# Altium PCB lite.PcbDoc
Units mil, origin at the board's own origin, x right, y up, seen from the top; angles counter-clockwise.
Board outline 6000 x 4000 mil, 2 copper layers (Top Layer, Bottom Layer); 45 components, 53 nets, 214 pads, 26 vias.
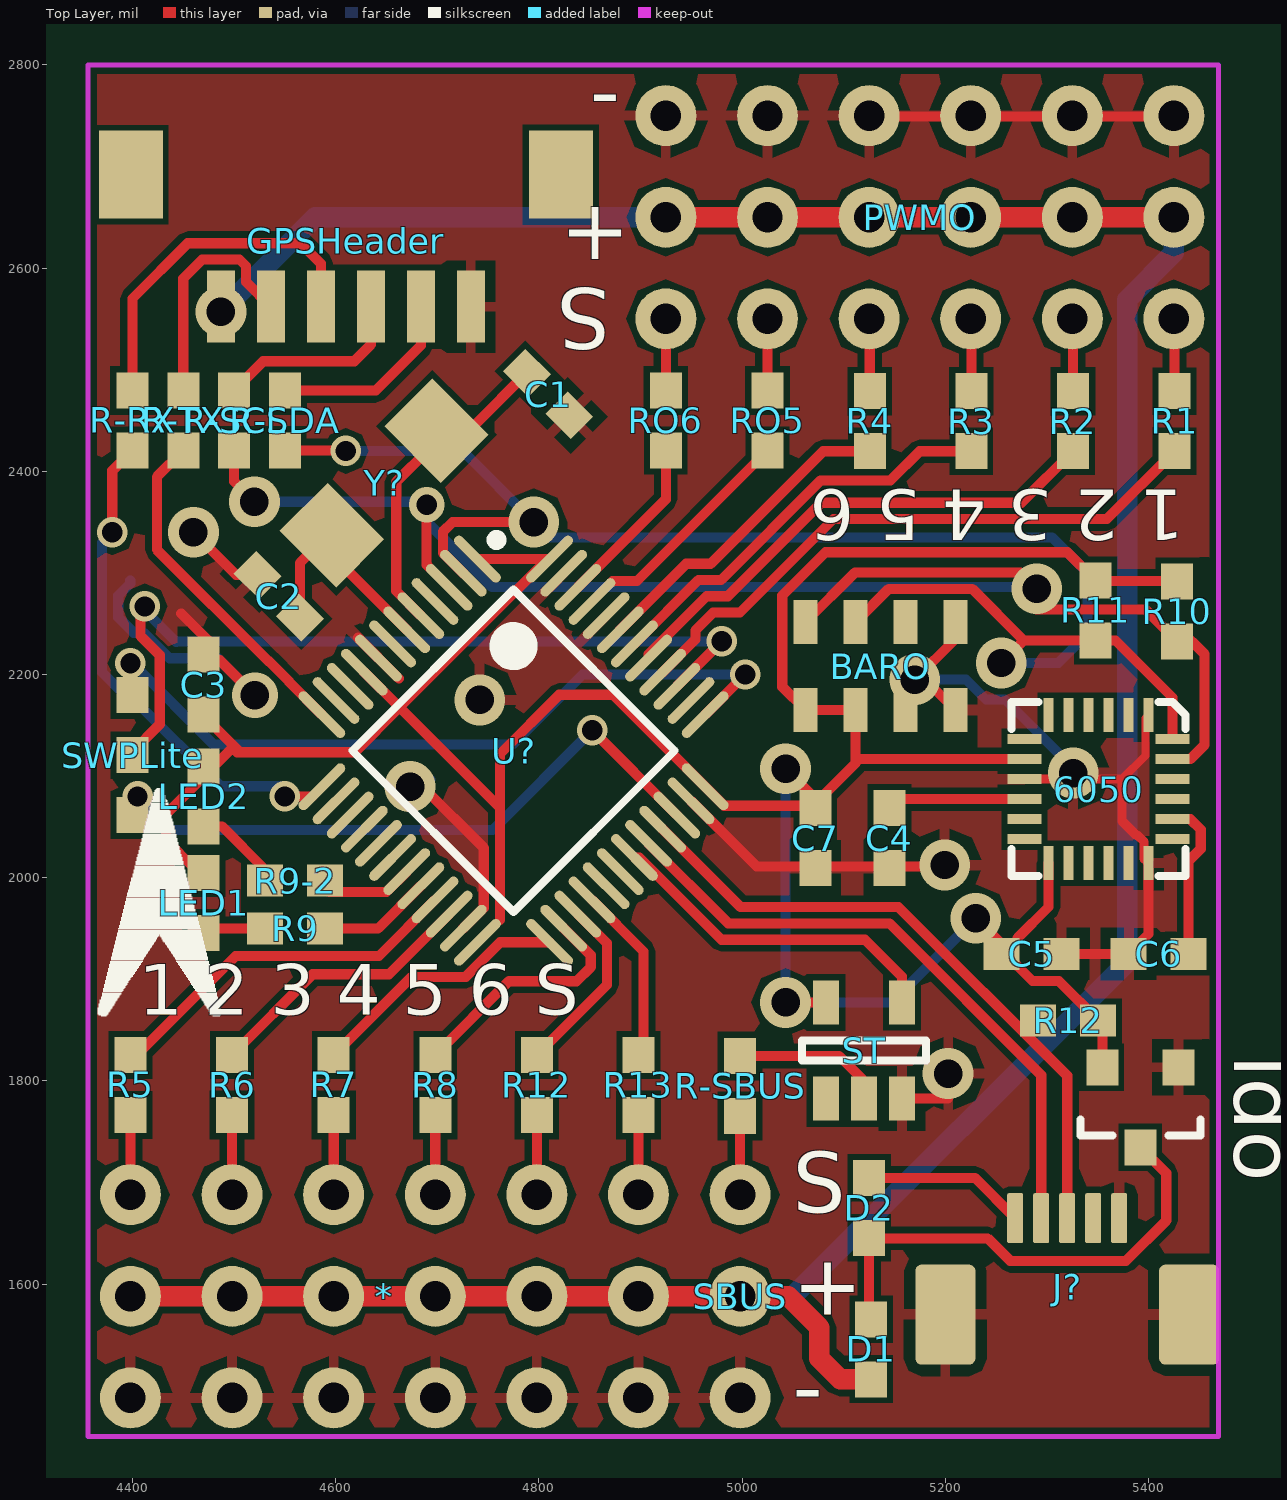
[diagram p0: Top Layer view]
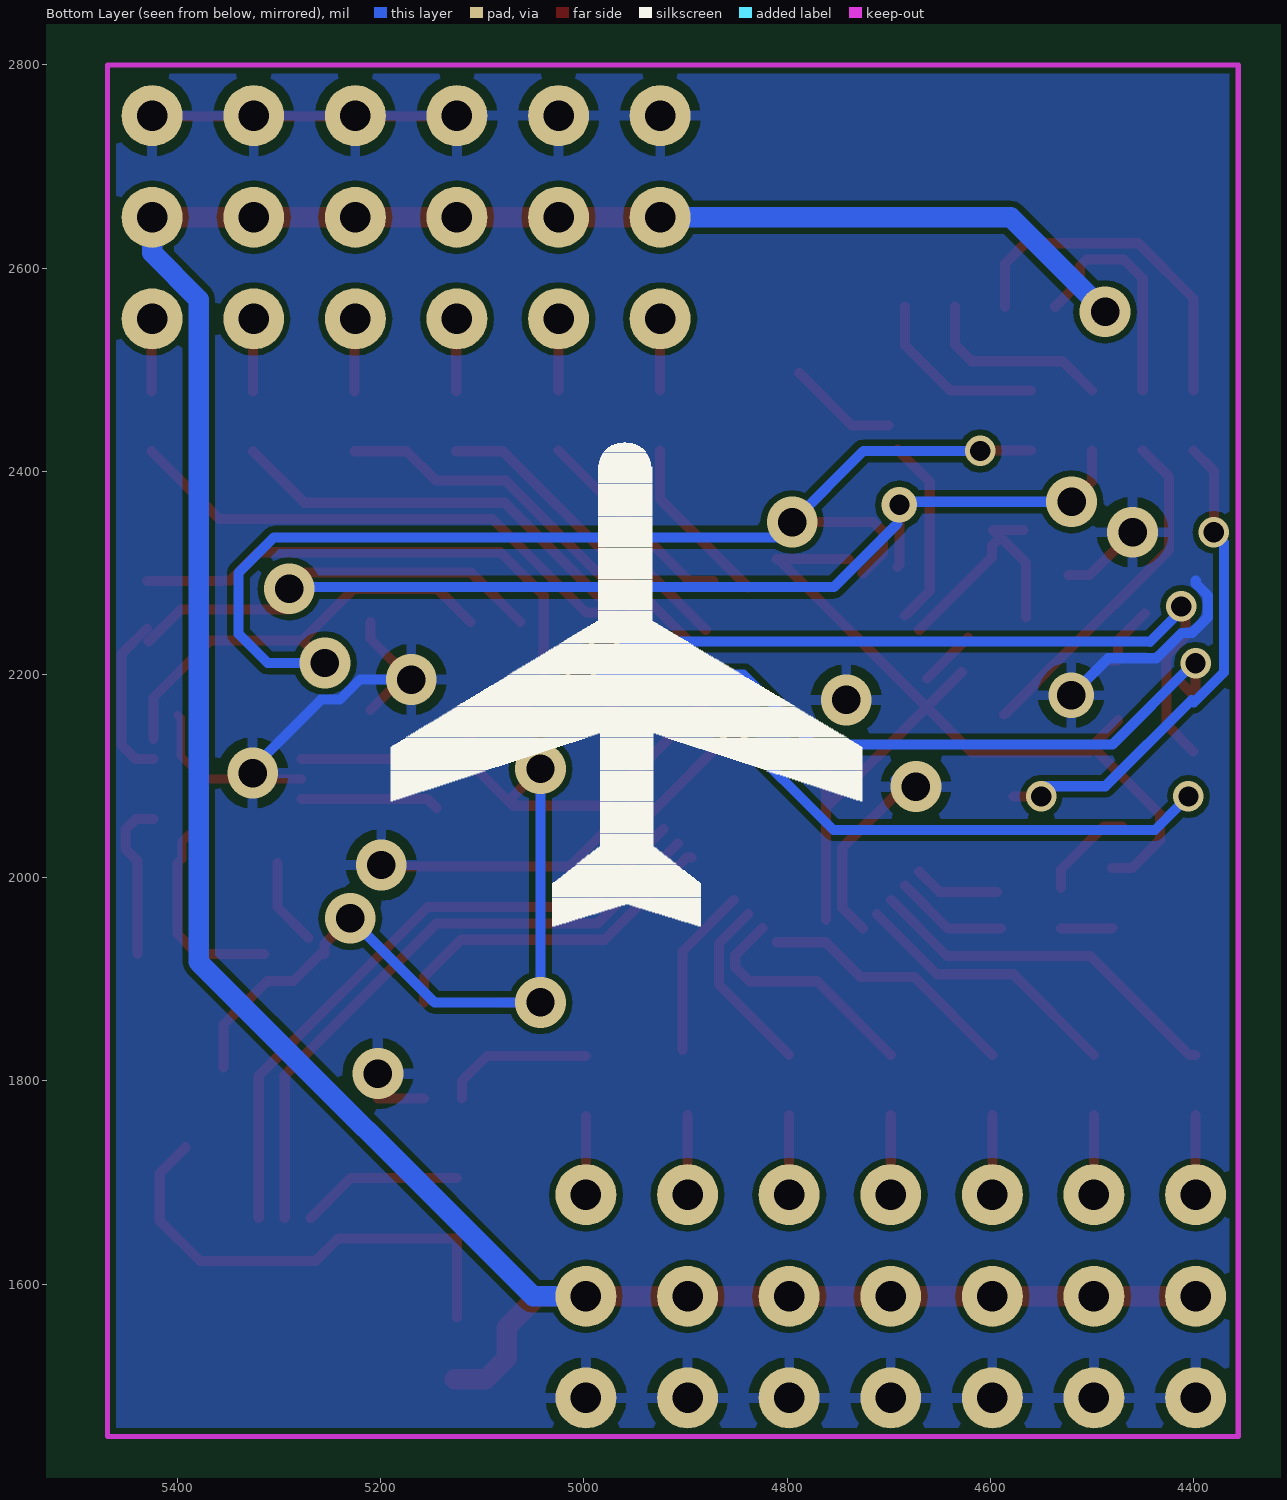
[diagram p1: Bottom Layer view, seen from below]

## Layer stack, top to bottom
Top Layer: signal copper 1.4
Dielectric: dielectric 12.6, FR-4, Dk 4.8
Bottom Layer: signal copper 1.4

## Board outline
1000,1000 7000,1000 7000,5000 1000,5000

## Design rules (kind name [scope] priority, off if disabled: settings)
Clearance [All] p1: gap=6
DiffPairsRouting [All] p1: maxlimit=10 minlimit=10 mostfreqgap=10 maxuncoupledlength=106.3
MinimumSolderMaskSliver [All] p1 off: minsoldermaskwidth=10
PolygonConnect [All] p1: connectstyle=Relief reliefconductorwidth=10 reliefentries=4 polygonreliefangle="90 Angle" airgapwidth=10
RoomDefinition schematic [InComponentClass('schematic')] p1: confinementstyle=ConfineIn formatcopy=TRUE lockcomponents=FALSE outline 5612,2938 4237,2938 4237,1360 5612,1360
RoutingVias [All] p1: holewidth=20 width=35 viastyle="Through Hole" minholewidth=12 minwidth=20 maxholewidth=28 maxwidth=50
SilkToSilkClearance [All] p1 off: silktosilkclearance=10
SilkToSolderMaskClearance [IsPad] p1 off: minsilkscreentomaskgap=10 clearancetoexposedcopper=TRUE
SolderMaskExpansion [All] p1 off: expansion=4
Width [All] p1: maxlimit=50 minlimit=6 preferedwidth=10
24 further rules are at their usual default settings.

## Components (designator, comment, footprint, x,y, rotation, side; value= is the part's Value field where it differs from the comment)
6050 "MPU6050" MPU6050 5400,2160 r270 top
* "PWMConnector6" PWMConnector6 4398,1688 r0 top
BARO "MS5611" MS5611 5210,2165 r90 top
C1 "Cap" "0603 - 3D" 4809,2476 r315 top
C2 "Cap" "0603 - 3D" 4544,2277 r315 top
C3 "Cap" "0603 - 3D" 4470,2190 r90 top
C4 "Cap" "0603 - 3D" 5145,2039 r90 top
C5 "Cap" "0603 - 3D" 5285,1925 r180 top
C6 "Cap" "0603 - 3D" 5410,1925 r180 top
C7 "" "0603 - 3D" 5072,2039 r90 top
D1 "Diode" "0603 - 3D" 5127.05,1535.81 r90 top
D2 "Diode" "0603 - 3D" 5125,1675 r270 top
GPSHeader "GPSHeader" DF13C-6P-SMT 4487,2562 r0 top
J? "USB Micro Type B (recommended if hand soldering)" USB 5320,1550 r90 top
ldo "662k" SOT23-3 5392,1774 r270 top
LED1 "Diode" "0603 - 3D" 4470,1975 r270 top
LED2 "Diode" "0603 - 3D" 4470,2080 r270 top
PWMO "PWMConnector6" PWMConnector6 5425,2550 r180 top
R1 "" "0603 - 3D" 5425.68,2449.32 r270 top
R2 "" "0603 - 3D" 5325.68,2449.32 r270 top
R3 "" "0603 - 3D" 5225.68,2449.32 r270 top
R4 "" "0603 - 3D" 5125.68,2449.32 r270 top
R5 "" "0603 - 3D" 4398,1796 r90 top
R6 "" "0603 - 3D" 4498,1796 r90 top
R7 "" "0603 - 3D" 4598,1796 r90 top
R8 "" "0603 - 3D" 4698,1796 r90 top
R9 "" "0603 - 3D" 4560,1950 r0 top
R9-2 "" "0603 - 3D" 4560,1997 r0 top
R10 "" "0603 - 3D" 5428.28,2262.19 r270 top
R11 "" "0603 - 3D" 5348,2263 r270 top
R12 "" "0603 - 3D" 5320.94,1859.53 r180 top
R12 "" "0603 - 3D" 4798,1796 r90 top
R13 "" "0603 - 3D" 4898,1796 r90 top
R-RX "" "0603 - 3D" 4400,2450 r90 top
R-SBUS "" "0603 - 3D" 4998,1795 r270 top
R-SCL "" "0603 - 3D" 4500,2450 r90 top
R-SDA "" "0603 - 3D" 4550,2450 r90 top
R-TX "" "0603 - 3D" 4450,2450 r90 top
RO5 "" "0603 - 3D" 5025,2450 r270 top
RO6 "" "0603 - 3D" 4925,2450 r270 top
SBUS "SBUS" SBUS 4998,1488 r90 top
ST "NC7S14" SOT23-5 5120,1830 r90 top
SWPLite "SWPLite" SWPLite 4400,2091 r90 top
U? "STM32F103C8T6" "LQFP48_L - 3D" 4775,2125 r315 top
Y? "XTAL" "5032 - XTAL" 4647.71,2388.59 r45 top

## Footprints (in the part's own frame and the unit in brackets; to place one, negate y for a bottom-side part, rotate by r counter-clockwise, add the part's x,y. Pads: shape width x height; smd on the part's side, far side on the other; paste and mask are expansions set on the pad)
"0603 - 3D" [mm]
  rect 0.9x0.8 smd: 1(-0.75,0) 2(0.75,0)
  body extent -1.02,-0.38 1.02,0.38, height 0.5
"5032 - XTAL" [mm]
  rect 1.7x2 smd: 1(-1.85,0) 2(1.85,0)
  body extent -2.5,-1.6 2.5,1.6, height 1.2
DF13C-6P-SMT [mm]
  rect 0.7x1.8 smd: 1(0,0) 2(1.25,0) 3(2.5,0) 4(3.75,0) 5(5,0) 6(6.25,0)
  rect 1.6x2.2 smd: SHELL(-2.25,3.3) SHELL(8.5,3.3)
  body extent -2.67,0.38 8.89,6.48, height 3
"LQFP48_L - 3D" [mm]
  oval 1.55x0.25 smd: 1(-4.025,2.75) 2(-4.025,2.25) 3(-4.025,1.75) 4(-4.025,1.25) 5(-4.025,0.75) 6(-4.025,0.25) 7(-4.025,-0.25) 8(-4.025,-0.75) 9(-4.025,-1.25) 10(-4.025,-1.75) 11(-4.025,-2.25) 12(-4.025,-2.75) 25(4.025,-2.75) 26(4.025,-2.25) 27(4.025,-1.75) 28(4.025,-1.25) 29(4.025,-0.75) 30(4.025,-0.25) 31(4.025,0.25) 32(4.025,0.75) 33(4.025,1.25) 34(4.025,1.75) 35(4.025,2.25) 36(4.025,2.75)
  oval 0.25x1.55 smd: 13(-2.75,-4.025) 14(-2.25,-4.025) 15(-1.75,-4.025) 16(-1.25,-4.025) 17(-0.75,-4.025) 18(-0.25,-4.025) 19(0.25,-4.025) 20(0.75,-4.025) 21(1.25,-4.025) 22(1.75,-4.025) 23(2.25,-4.025) 24(2.75,-4.025) 37(2.75,4.025) 38(2.25,4.025) 39(1.75,4.025) 40(1.25,4.025) 41(0.75,4.025) 42(0.25,4.025) 43(-0.25,4.025) 44(-0.75,4.025) 45(-1.25,4.025) 46(-1.75,4.025) 47(-2.25,4.025) 48(-2.75,4.025)
  silkscreen extent -4.15,-2.85 2.85,3.55, body extent -3.48,-3.51 3.48,3.48, height 1.5
MPU6050 [mm]
  rect 0.85x0.25 smd: 1(0,0) 2(0,-0.5) 3(0,-1) 4(0,-1.5) 5(0,-2) 6(0,-2.5) 13(3.7,-2.5) 14(3.7,-2) 15(3.7,-1.5) 16(3.7,-1) 17(3.7,-0.5) 18(3.7,0)
  rect 0.25x0.85 smd: 7(0.6,-3.1) 8(1.1,-3.1) 9(1.6,-3.1) 10(2.1,-3.1) 11(2.6,-3.1) 12(3.1,-3.1) 19(3.1,0.6) 20(2.6,0.6) 21(2.1,0.6) 22(1.6,0.6) 23(1.1,0.6) 24(0.6,0.6)
  silkscreen extent -0.33,-3.42 4.02,0.92, body extent -0.13,-3.3 3.81,0.76, height 1
MS5611 [mm]
  rect 1.1x0.6 smd: 1(0,3.75) 2(0,2.5) 3(0,1.25) 4(0,0) 5(2.2,0) 6(2.2,1.25) 7(2.2,2.5) 8(2.2,3.75)
  body extent -0.51,-0.51 2.67,4.32, height 1
PWMConnector6 [mil]
  round 60 hole 30: 1(0,0) 2(100,0) 3(200,0) 4(300,0) 5(400,0) 6(500,0) GND(0,-200) GND(100,-200) GND(200,-200) GND(300,-200) GND(400,-200) GND(500,-200) VCC5V(0,-100) VCC5V(100,-100) VCC5V(200,-100) VCC5V(300,-100) VCC5V(400,-100) VCC5V(500,-100)
SBUS [mil]
  round 60 hole 30: 1(0,0) 2(100,0) 3(200,0)
SOT23-3 [mm] "SOT23, 3-Leads, Body 2.9x1.3mm, Pitch 0.95mm, Lead Span 2.5mm, IPC Low Density"
  rect 0.9x0.8 smd: 1(-1,0.95) 2(-1,-0.95) 3(1,0)
  silkscreen extent 0.3,-1.5 0.7,1.5, body extent -0.7,-1.5 0.7,1.5, height 1.1
SOT23-5 [mm]
  rect 1.1x0.65 smd paste-0.102 mask+0.051: 1(-1.2,0.95) 2(-1.2,0) 3(-1.2,-0.95) 4(1.2,-0.95) 5(1.2,0.95)
  silkscreen extent -0.25,-1.55 0.25,1.55
SWPLite [mm]
  rect 0.9x0.8 smd: 1(-0.75,0) 2(0.75,0) 3(2.25,0)
USB [mm]
  round 0.508 on Mech15: 0(-0.508,0)
  rrect20% 1.25x0.4 smd: 1(2.919,1.3) 2(2.919,0.65) 3(2.919,0) 4(2.919,-0.65) 5(2.919,-1.3)
  rrect20% 2.5x1.5 smd: SH(0.508,3.048) SH(0.508,-3.048)

## Part data
C1 C2 C3 C4 C5 C6: "Capacitor"
C7: library part Cap, "Capacitor"
D1 D2 LED1 LED2: "Default Diode"
J?: library part USB_Micro_TypeB_FCI, "Connector SMD-THD USB Micro Type B middle mount"
R1 R2 R3 R4 R5 R6 R7 R8 R9 R9-2 R10 R11 R12 R12 R13 R-RX R-SBUS R-SCL R-SDA R-TX RO5 RO6: library part Res2, "Resistor"
U?: "STM32 ARM-based 32-bit MCU with 64 Kbytes Flash, 48-pin LQFP, Industrial Temperature"
Y?: "Crystal Oscillator"

## Via types
v1: diameter 50, hole 28, Top Layer to Bottom Layer, 15 vias
v2: diameter 30, hole 20, Top Layer to Bottom Layer, 9 vias
v3: diameter 45, hole 28, Top Layer to Bottom Layer, 1 vias
v4: diameter 35, hole 20, Top Layer to Bottom Layer, 1 vias

## Nets (pads, with @x,y where several pads share a name; then routed paths per layer and width w, separated by ;. In a path a pad name is that pad's centre, name@x,y a point inside that pad or via, vN(x,y) a via of type N, cw(c..) or ccw(c..) an arc to the next point about the centre after c; other vN are vias at no path point)
GND: 6050.1 6050.9 6050.18 *.GND BARO.3 BARO.4 BARO.5 C1.2 C2.1 C3.2 C4.1 C5.1 C6.2 C7.1 GPSHeader.6 J?.5 J?.SH ldo.1 PWMO.GND SBUS.1 ST.3 U?.8 U?.23 U?.35 U?.44 U?.47 | length 2103.9
  Top Layer w8: 5373.9,2097.01 5396.89,2120 5396.89,2156.89 6050.1
  Top Layer w9: 6050.9 v1@5343,2097.01 ; v1(5326,2103) 5331.01,2103 5340,2094.01 v1@5343,2097.01 ; 6050.18 5395.74,2018.59 5395.74,2035.41 5389.58,2041.56 5388.17,2041.56 5373.9,2055.83 5373.9,2097.01 v1@5343,2097.01
  Top Layer w10: 4448,2260 4474.25,2233.75 4474.25,2214.06 4485.94,2214.06 v3(4520.47,2179.53) ; v1(4460,2340) 4502.12,2297.88 C2.1 ; U?.8@4621.97,2236.27 U?.8@4662.17,2196.08 ; v1(4673.25,2089.64) 4685.36,2089.64 4745.68,2029.32 4745.68,1970.41 U?.23 ; U?.35 5014.27,2011 5198,2011 v1(5199.47,2012.47) ; PWMO.GND@5125.68,2749.32 PWMO.GND@5425.68,2749.32 ; ST.3 5202.76,1782.76 v1(5202.76,1807.24) ; v1(5170,2195) 5210,2235 BARO.5 ; v1@5180,2195 BARO.4 ; C5.1 C6.2 5400,1944.53 6050.18
  Bottom Layer w10: 4397.77,2292.23 4397.77,2289.54 4386,2277.77 4386,2256.23 4401.23,2241 4411.37,2241 4436.37,2216 4484,2216 v3(4520.47,2179.53) ; v1(4673.25,2089.64) 4673.25,2076.75 v1@4693.25,2096.75 ; v1(5170,2195) 5220.4,2195 5240.09,2175.31 5258.7,2175.31 5331.01,2103 v1(5326,2103)
  other v1: 4741.88,2175
Net6050_10: 6050.10 C4.2 | length 136.6
  Top Layer w10: C4.2 5153.79,2077.32 6050.10
Net6050_20: 6050.20 C6.1 | length 159.3
  Top Layer w10: 6050.20 5441.15,2057.64 5451.35,2047.43 5451.35,2028.47 5439.53,2016.65 C6.1
Net6050_23: 6050.23 BARO.8 R10.2 R-SCL.1 U?.3 | length 1508.3
  Top Layer w10: R-SCL.1 4500,2390 v1(4520,2370) ; v4@4689.49,2369.49 4689.49,2307.95 U?.3@4691.49,2305.95 ; BARO.8 5111.02,2300.27 5274.09,2300.27 v1(5290,2284.36) ; v1@5290,2263.81 5397.13,2263.81 R10.2 ; 6050.23 5441.15,2116.69 5455.25,2130.8 5455.25,2220 R10.2@5430,2245.25
  Bottom Layer w10: v1(4520,2370) 4690,2370 4691.49,2368.51 4691.49,2348.51 4754,2286 5288.36,2286 v1(5290,2284.36)
  other v4: 4689.49,2367
Net6050_24: 6050.24 BARO.7 R11.2 R-SDA.1 U?.2 | length 1571.6
  Top Layer w10: R-SDA.1@4560,2420.47 4609.53,2420.47 v2(4610,2420) ; U?.2 4705.49,2319.78 4705.49,2340.49 4715,2350 v1(4795,2350) ; BARO.7 5111.77,2251.61 5144.42,2284.27 5226.37,2284.27 5277.16,2233.47 ; v1(5255,2211.31) 5277.16,2233.47 ; 6050.24 5423.62,2177.43 5367.57,2233.47 R11.2 5277.16,2233.47
  Bottom Layer w10: v2(4610,2420) 4725,2420 v1(4795,2350) 4810,2335 5305,2335 5340,2300 5340,2240 5311.31,2211.31 v1(5255,2211.31)
Net*_1: *.1 R5.1 | length 78.5
  Top Layer w10: *.1 R5.1
Net*_2: *.2 R6.1 | length 78.5
  Top Layer w10: *.2 R6.1
Net*_3: *.3 R7.1 | length 78.5
  Top Layer w10: *.3 R7.1
Net*_4: *.4 R8.1 | length 78.5
  Top Layer w10: *.4 R8.1
Net*_5: *.5 R12.1@4798,1766.47 | length 78.5
  Top Layer w10: *.5 R12.1@4798,1766.47
Net*_6: *.6 R13.1 | length 78.5
  Top Layer w10: *.6 R13.1
NetC1_1: C1.1 U?.5 Y?.2 | length 296.3
  Top Layer w10: U?.5 4659.62,2282.14 4659.62,2389.62 Y?.2@4691.5,2421.5 ; Y?.2@4700.12,2445.07 4736.32,2445.07 C1.1
NetC2_2: C2.2 U?.6 Y?.1 | length 253.2
  Top Layer w10: C2.2 4564.88,2309.83 Y?.1@4590.02,2334.98 ; Y?.1@4567.31,2342.07 4597.12,2342.07 Y?.1@4590.02,2334.98 ; U?.6 4598.5,2315.42 4598.5,2326.5 Y?.1@4590.02,2334.98
NetD2_1: D2.1 J?.1 | length 160.2
  Top Layer w10: D2.1 5229.21,1704.53 J?.1
NetGPSHeader_2: GPSHeader.2 R-TX.2 | length 232.5
  Top Layer w10: R-TX.2 4450,2589.77 4468.66,2608.43 4505.34,2608.43 4511.78,2601.99 4511.78,2586.43 GPSHeader.2
NetGPSHeader_3: GPSHeader.3 R-RX.2 | length 349.2
  Top Layer w10: R-RX.2 4400,2570 4454.43,2624.43 4565.57,2624.43 4585.43,2604.57 GPSHeader.3
NetGPSHeader_4: GPSHeader.4 R-SCL.2 | length 190.7
  Top Layer w10: R-SCL.2 4528.72,2508.24 4618.24,2508.24 4634.64,2524.64 GPSHeader.4
NetGPSHeader_5: GPSHeader.5 R-SDA.2 | length 180.4
  Top Layer w10: R-SDA.2@4560,2479.53 4639.53,2479.53 4683.85,2523.85 GPSHeader.5
NetJ?_2: J?.2 U?.32 | length 621.8
  Top Layer w10: U?.32@4907.71,2033.61 4986.31,1955 5145,1955 5294.41,1805.59 J?.2
NetJ?_3: J?.3 R12.2@5291.42,1859.53 U?.33 | length 638.8
  Top Layer w10: U?.33 4998.6,1971 5154,1971 5320,1805 J?.3
NetLED1_2: LED1.2 R9.1 | length 50.7
  Top Layer w10: LED1.2@4480,1950.47 4480.47,1950 R9.1
NetLED2_2: LED2.2 R9-2.1 | length 96.1
  Top Layer w10: LED2.2 4488.08,2050.47 4530.47,2008.08 R9-2.1@4530.47,1990
NetPWMO_1: PWMO.1 R1.1 | length 70.5
  Top Layer w10: R1.1 PWMO.1@5425.68,2549.32
NetPWMO_2: PWMO.2 R2.1 | length 70.5
  Top Layer w10: R2.1 PWMO.2@5325.68,2549.32
NetPWMO_3: PWMO.3 R3.1 | length 70.5
  Top Layer w10: R3.1 PWMO.3@5225.68,2549.32
NetPWMO_4: PWMO.4 R4.1 | length 70.5
  Top Layer w10: R4.1 PWMO.4@5125.68,2549.32
NetPWMO_5: PWMO.5 RO5.1 | length 70.5
  Top Layer w10: RO5.1 PWMO.5
NetPWMO_6: PWMO.6 RO6.1 | length 70.5
  Top Layer w10: RO6.1 PWMO.6
NetR1_2: R1.2 U?.40 | length 599.2
  Top Layer w10: U?.40 4954,2234.4 4954,2243.33 4971.67,2261 4998,2261 5090,2353 5358.88,2353 R1.2
NetR2_2: R2.2 U?.41 | length 504.3
  Top Layer w10: U?.41 4907.93,2219.89 4965.04,2277 4986,2277 5078,2369 5274.88,2369 R2.2
NetR3_2: R3.2 U?.42 | length 410.2
  Top Layer w10: U?.42 4956.92,2293 4979.37,2293 5077.45,2391.08 5145.98,2391.08 5174.7,2419.8 R3.2
NetR4_2: R4.2 U?.43 | length 318.4
  Top Layer w10: U?.43 4945.08,2309 4969,2309 5079.8,2419.8 R4.2
NetR5_2: R5.2 U?.21 | length 363
  Top Layer w10: R5.2 4404.08,1825.53 4501.55,1923 4642.6,1923 U?.21
NetR6_2: R6.2 U?.22 | length 271.1
  Top Layer w10: R6.2 4577.47,1905 4652.44,1905 U?.22
NetR7_2: R7.2 U?.25 | length 258.4
  Top Layer w10: R7.2 4674.85,1902.38 4728.01,1902.38 4762.02,1936.39 U?.25
NetR8_2: R8.2 U?.26 | length 238.1
  Top Layer w10: R8.2 4770.47,1898 4837,1898 4851,1912 4851,1923.73 U?.26
NetR9-2_2: R9-2.2 U?.19 | length 84.6
  Top Layer w10: R9-2.2@4593.64,1985.89 4649.81,1985.89 U?.19
NetR9_2: R9.2 U?.20 | length 111.7
  Top Layer w10: R9.2 4641.76,1950 U?.20
NetR12_2: R12.2@4798,1825.53 U?.27 | length 179.2
  Top Layer w10: R12.2@4798,1825.53 4867,1894.53 4867,1935.56 U?.27
NetR13_2: R13.2 U?.28 | length 168.6
  Top Layer w10: U?.28 4903,1927.4 R13.2@4903,1830.53
NetR-RX_1: R-RX.1 U?.13 | length 492.7
  Top Layer w10: v2(4380,2340) 4380,2400.47 R-RX.1 ; v2(4550,2080) U?.13@4576.89,2080
  Bottom Layer w10: v2(4380,2340) 4370,2330 4370,2202.23 4399.73,2172.5 ; 4402,2174.77 4486.77,2090 4550,2090 v2(4550,2080)
NetR-SBUS_1: R-SBUS.1 ST.2 | length 149.4
  Top Layer w10: R-SBUS.1 5095.47,1824.53 5120,1800 ST.2
NetR-SBUS_2: R-SBUS.2 SBUS.3 | length 77.5
  Top Layer w10: SBUS.3 R-SBUS.2
NetR-TX_1: R-TX.1 U?.12 | length 338.3
  Top Layer w10: R-TX.1 4424,2394.47 4424,2322.89 4533.86,2213.03 4534.35,2213.03 4553.97,2193.4 4553.97,2192.91 U?.12
NetRO5_2: RO5.2 U?.45 | length 205.9
  Top Layer w10: U?.45@4872.35,2291.95 4896.47,2291.95 RO5.2
NetRO6_2: RO6.2 U?.46 | length 170.6
  Top Layer w10: U?.46 4925,2372.44 RO6.2
NetST_4: ST.4 U?.31 | length 337.3
  Top Layer w10: U?.31 4898.78,2019.91 4979.69,1939 5121,1939 5157.4,1902.6 ST.4
NetSWPLite_1: SWPLite.1 U?.34 | length 623.6
  Top Layer w10: v2(4405,2080) v2@4410.19,2085.19 ; v2(4852.44,2145) U?.34
  Bottom Layer w10: v2(4405,2080) v2@4410.19,2085.19 ; v2@4412.5,2072.5 4438,2047 4754.44,2047 v2(4852.44,2145)
NetSWPLite_2: SWPLite.2 U?.39 | length 819
  Top Layer w10: SWPLite.2@4400,2124.12 4426.75,2150.87 4426.75,2219.02 4408,2237.77 4408,2267 v2(4412,2267) ; U?.39 v2(4980,2232.56)
  Bottom Layer w10: v2(4412,2267) 4408,2267 4443,2232 4443.56,2232.56 v2(4980,2232.56)
NetSWPLite_3: SWPLite.3 U?.37 | length 765.7
  Top Layer w10: v2(4398,2211) 4398,2181.58 SWPLite.3 SWPLite.3@4410,2189.58 ; U?.37 v2(5003.11,2200)
  Bottom Layer w10: v2@4401,2210 4480,2131 4774,2131 4843,2200 v2(5003.11,2200)
VCC: 6050.8 6050.13 BARO.1 BARO.2 C3.1 C5.2 C7.2 ldo.2 LED1.1 LED2.1 R10.1 R11.1 R12.1@5350.47,1859.53 ST.5 U?.1 U?.9 U?.24 U?.36 U?.48 | length 3086.8
  Top Layer w10: C3.1@4474.25,2155 4503.05,2126.2 ; LED1.1@4480,2009.53 4460.47,2009.53 4433.09,2036.91 4433.09,2062.62 4496.67,2126.2 ; 4503.05,2123.52 4618.61,2123.52 4662.75,2167.66 ; U?.9 4662.75,2167.66 ; U?.1 U?.48@4808.7,2313.61 ; 4761.68,1958.57 4761.68,2068.72 ; U?.48 U?.48@4808.7,2313.61 ; v1(5042.76,1877.24) ST.5 ; v1(5042.76,2107.24) C7.2@5072,2078 ; 5115.69,2116.69 6050.8 ; v1(5230,1960) 5255.47,1934.53 C5.2 ; C5.2@5259.06,1925 5285.81,1898.25 5311.75,1898.25 R12.1@5350.47,1859.53 ; 5271.24,1940.76 5301.57,1971.1 6050.13 ; R11.1@5353.53,2292.53 R11.1 5320.17,2320.36 5082.09,2320.36 5039.55,2277.82 5039.55,2187.81 BARO.1 BARO.2 5111.57,2112.57 5069.76,2070.76 4982.35,2070.76 U?.36 4873.11,2180 4820,2180 4761.68,2121.68 4761.68,2068.72 ; ldo.2 R12.1@5354.6,1855.4 ; R11.1@5356,2292 R10.1@5430,2292 ; 4662.75,2167.66 U?.48@4808.7,2313.61 ; 4662.75,2167.66 4761.68,2068.72
  Bottom Layer w10: v1(5042.76,2107.24) v1(5042.76,1877.24) 5147.24,1877.24 v1(5230,1960)
VCC5V: D1.2 D2.2 ldo.3 | length 479.1
  Top Layer w10: D1.2@5125,1567.39 D2.2 5125.47,1645 5241.63,1645 5263.81,1622.82 5377.82,1622.82 5417.5,1662.5 5417.5,1709.13 ldo.3
VCCOUT: *.VCC5V D1.1 GPSHeader.1 PWMO.VCC5V SBUS.2 | length 3031.5
  Top Layer w20: *.VCC5V@4398,1588 4498,1588 4598,1588 4698,1588 4798,1588 4898,1588 SBUS.2 5045.34,1588 5076,1557.34 5076,1527 5096.72,1506.28 D1.1 ; v1(4487,2557) GPSHeader.1 ; PWMO.VCC5V@4925,2650 5025,2650 5125,2650 5225,2650 5325,2650 PWMO.VCC5V@5425,2650
  Bottom Layer w20: v1(4487,2557) 4580,2650 PWMO.VCC5V@4925,2650 ; SBUS.2 5050,1588 5379,1917 5379,2569.05 5425,2615.05 PWMO.VCC5V@5425,2650
pads on no net: 6050.2 6050.3 6050.4 6050.5 6050.6 6050.7 6050.11 6050.12 6050.14 6050.15 6050.16 6050.17 6050.19 6050.21 6050.22 BARO.6 GPSHeader.SHELL J?.0 J?.4 ST.1 U?.4 U?.7 U?.10 U?.11 U?.14 U?.15 U?.16 U?.17 U?.18 U?.29 U?.30 U?.38

## Polygon pours and split planes (outlines as drawn)
GND on Bottom Layer "Top Layer-No Net" (solid, pour order 4): 4356,1451 5468.38,1451 5468.38,2800 4356,2800
GND on Top Layer "Top Layer-No Net" (solid, remove dead copper, pour order 6): 4356,2800 5466.75,2800 5466.75,1451 4356,1451

## Keep-outs
Keep-Out Layer:
  lines w5: 4356,1450 4356,2800 5468.75,2800 5468.75,1450 4356,1450

## Silkscreen, mask and mechanical layers (free items; w line width, h text height)
Top Overlay:
  drawing of 306 lines, arcs and shapes, not listed
  text "-" at 4880,2790 h60 r180
  text "+" at 4890,2660 h60 r180
  text "S" at 4870,2580 h60 r180
  text "1 2 3 4 5 6" at 5435,2382 h50 r180
  text "1 2 3 4 5 6 S" at 4406,1865 h50
  text "S" at 5050,1670 h60
  text "+" at 5050,1570 h60
  text "-" at 5050,1470 h60
Bottom Overlay:
  drawing of 633 lines, arcs and shapes, not listed